# EAGLE board rover (EAGLE 9.6.2)

Size 73.66 x 53.34 mm. Coordinates in mm from the lower left corner, seen from the top.
Outline: 46.99,48.26 arc-90 49.53,50.8
Outline: 0,0 73.66,0 73.66,53.34 0,53.34 0,0
Copper layers (1*16): Top 0.035mm / dielectric 1.5mm / Bottom 0.035mm
Design rules "default": minimum track width 6mil, minimum drill 0.35mm, track to track 6mil, track to pad 6mil, pad to pad 6mil, via to via 6mil, smd to smd 6mil, copper to edge 40mil, drill to drill 6mil, minimum pad ring 10mil, minimum via ring 8mil, stop-mask expansion 4mil, vias tented up to drill 0mil, thermal gap 10mil

## Footprints (pad centres in the part's own frame; a part is rotated, then mirrored left to right if it is on the bottom)
C1206 = smd 1.6 x 1.8: 1 -1.4,0; 2 1.4,0
SMADIODE = smd 2.54 x 2.54: A 2.349,0; C -2.349,0
B4B-XH-A(LF)(SN) = drill 0.9 square: 1 -3.75,0 | drill 0.9: 2 -1.25,0; 3 1.25,0; 4 3.75,0
CHIP-LED0805 = smd 1.2 x 1.2: A 0,-1.05; C 0,1.05
SOT223 = smd 1.219 x 2.235: 1 -2.311,-3.099; 2 0,-3.099; 3 2.311,-3.099 | smd 3.6 x 2.2: 4 0,3.099
B02B-PASK(LF)(SN) = drill 0.7 square: 1 1,0 | drill 0.7: 2 -1,0
1X06_ROUND_76 = drill 1 pad 1.93: 1 -6.35,0; 2 -3.81,0; 3 -1.27,0; 4 1.27,0; 5 3.81,0; 6 6.35,0
1X04_ROUND_76 = drill 1 pad 1.93: 1 -3.81,0; 2 -1.27,0; 3 1.27,0; 4 3.81,0
R0603 = smd 1 x 1.1: 1 -0.85,0; 2 0.85,0
SWITCH_DPDT_SMD_AYZ0202 = smd 1 x 1.15: 1 -2.5,2.825; 2 0,2.825; 3 2.5,2.825; 4 -2.5,-2.825; 5 0,-2.825; 6 2.5,-2.825 | hole 0.85: 1.5,0; -1.5,0
B3B-ZR(LF)(SN) = drill 0.7 square: 1 1.5,0 | drill 0.7: 2 0,0; 3 -1.5,0
TEENSY_4.0-BASIC = drill 0.965: 0/RX -13.97,-7.62; 1/TX -11.43,-7.62; 2 -8.89,-7.62; 3/CANTX -6.35,-7.62; 3V3_LN 16.51,-2.54; 3V3_LO -11.43,7.62; 4/CANRX -3.81,-7.62; 5 -1.27,-7.62; 6 1.27,-7.62; 7 3.81,-7.62; 8 6.35,-7.62; 9/CS 8.89,-7.62; 10/CS 11.43,-7.62; 11/MOSI 13.97,-7.62; 12/MISO 16.51,-7.62; 13/SCK 16.51,7.62; 14/A0 13.97,7.62; 15/A1 11.43,7.62; 16/A2 8.89,7.62; 17/A3 6.35,7.62; 18/A4/SDA 3.81,7.62; 19/A5/SCL 1.27,7.62; 20/A6 -1.27,7.62; 21/A7 -3.81,7.62; 22/A8 -6.35,7.62; 23/A9 -8.89,7.62; GND -16.51,-7.62; GND2 -13.97,7.62; GND3 16.51,0; ON/OFF 16.51,5.08; PROG 16.51,2.54; VBAT\ 16.51,-5.08; VIN -16.51,7.62

## Placement (x,y rotation side)
C1  47u  [C1206]  12.7,34.29 0 top
C2  47u  [C1206]  19.05,34.29 0 top
D1  [SMADIODE]  13.97,40.64 180 top
FL_ENC  B4B-XH-A(LF)(SN)  [B4B-XH-A(LF)(SN)]  24.13,13.97 0 top
FR_ENC  B4B-XH-A(LF)(SN)  [B4B-XH-A(LF)(SN)]  24.13,2.54 0 top
GREEN  ON  [CHIP-LED0805]  27.94,45.72 270 top
IC1  MC33269ST-5.0T3  [SOT223]  13.97,48.26 0 top
J1  B02B-PASK(LF)(SN)  [B02B-PASK(LF)(SN)]  3.81,46.99 0 top
JP3  [1X06_ROUND_76]  60.32,31.75 0 top
JP4  [1X04_ROUND_76]  60.32,49.53 0 top
R1  1k  [R0603]  20.32,46.99 0 top
RL_ENC  B4B-XH-A(LF)(SN)  [B4B-XH-A(LF)(SN)]  7.62,13.97 0 top
RR_ENC  B4B-XH-A(LF)(SN)  [B4B-XH-A(LF)(SN)]  7.62,2.54 0 top
S1  [SWITCH_DPDT_SMD_AYZ0202]  3.81,35.56 0 top
STEER_ENC  B3B-ZR(LF)(SN)  [B3B-ZR(LF)(SN)]  21.59,24.13 0 top
U$5  TEENSY_4.0-BASIC  [TEENSY_4.0-BASIC]  55.88,8.89 180 top

## Library data of the parts
C1 C2 D1 GREEN R1 = adafruit
FL_ENC FR_ENC RL_ENC RR_ENC = Headers; CREATED_BY: PCBLayout.com; DIGIKEY_PARTNO: 455-2249-ND; MANUFACTURER: JST Sales America Inc.; MPN: B4B-XH-A(LF)(SN)
IC1 = linear
J1 = Headers; CREATED_BY: PCBLayout.com; DIGIKEY_PARTNO: 455-1817-ND; MANUFACTURER: JST Sales America Inc.; MPN: B02B-PASK(LF)(SN)
JP3 JP4 = microbuilder
S1 = SparkFun-Switches; PROD_ID: SWCH-08179; SF_ID: COM-00597
STEER_ENC = Headers; CREATED_BY: PCBLayout.com; DIGIKEY_PARTNO: 455-1658-ND; MANUFACTURER: JST Sales America Inc.; MPN: B3B-ZR(LF)(SN)
U$5 = Teensy-4.0

## Nets
+3.3V: JP3.2
+5V: C2.1 FL_ENC.1 FR_ENC.1 IC1.2 IC1.4 JP3.1 R1.1 RL_ENC.1 RR_ENC.1 STEER_ENC.1 U$5.VIN
ESC: U$5.3/CANTX
FL_ENC_A: FL_ENC.2 U$5.5
FL_ENC_B: FL_ENC.4 U$5.6
FR_ENC_A: FR_ENC.2 U$5.7
FR_ENC_B: FR_ENC.4 U$5.8
GND: C1.2 C2.2 FL_ENC.3 FR_ENC.3 GREEN.C IC1.1 J1.2 JP3.3 RL_ENC.3 RR_ENC.3 STEER_ENC.3 U$5.GND U$5.GND2
I2CADDR_3V: JP4.4
INT_3V: JP4.3
N$1: GREEN.A R1.2
N$2: C1.1 D1.C IC1.3
N$3: D1.A S1.3
PS0_3V: JP4.1
PS1_3V: JP4.2
PWRIN: J1.1 S1.2
REC_ESC: U$5.15/A1
REC_SERVO: U$5.14/A0
RL_ENC_A: RL_ENC.2 U$5.9/CS
RL_ENC_B: RL_ENC.4 U$5.10/CS
RR_ENC_A: RR_ENC.2 U$5.11/MOSI
RR_ENC_B: RR_ENC.4 U$5.12/MISO
RST_5V: JP3.6
SCL_5V: JP3.5 U$5.19/A5/SCL
SDA_5V: JP3.4 U$5.18/A4/SDA
SERVO: U$5.2
STEER_ENC: STEER_ENC.2 U$5.23/A9

## Tracks (layer width: path | path; a pad name or v marks a point on that pad's centre or on a via)
+5V  (10 unrouted)
FL_ENC_A  (1 unrouted)
FL_ENC_B  (1 unrouted)
FR_ENC_A  (1 unrouted)
FR_ENC_B  (1 unrouted)
GND  (12 unrouted)
N$1  (1 unrouted)
N$2  (2 unrouted)
N$3  (1 unrouted)
PWRIN  (1 unrouted)
RL_ENC_A  (1 unrouted)
RL_ENC_B  (1 unrouted)
RR_ENC_A  (1 unrouted)
RR_ENC_B  (1 unrouted)
SCL_5V  (1 unrouted)
SDA_5V  (1 unrouted)
STEER_ENC  (1 unrouted)

## Text on the board
tPlace: INT | PS0 | PS1 | ADR | BNO055 | 9-Axis Abs. / Orientation | Vin | 3vo | GND | SDA | SCL | RST